# EAGLE board turbidimeter_fritzing (EAGLE 6.5.0)
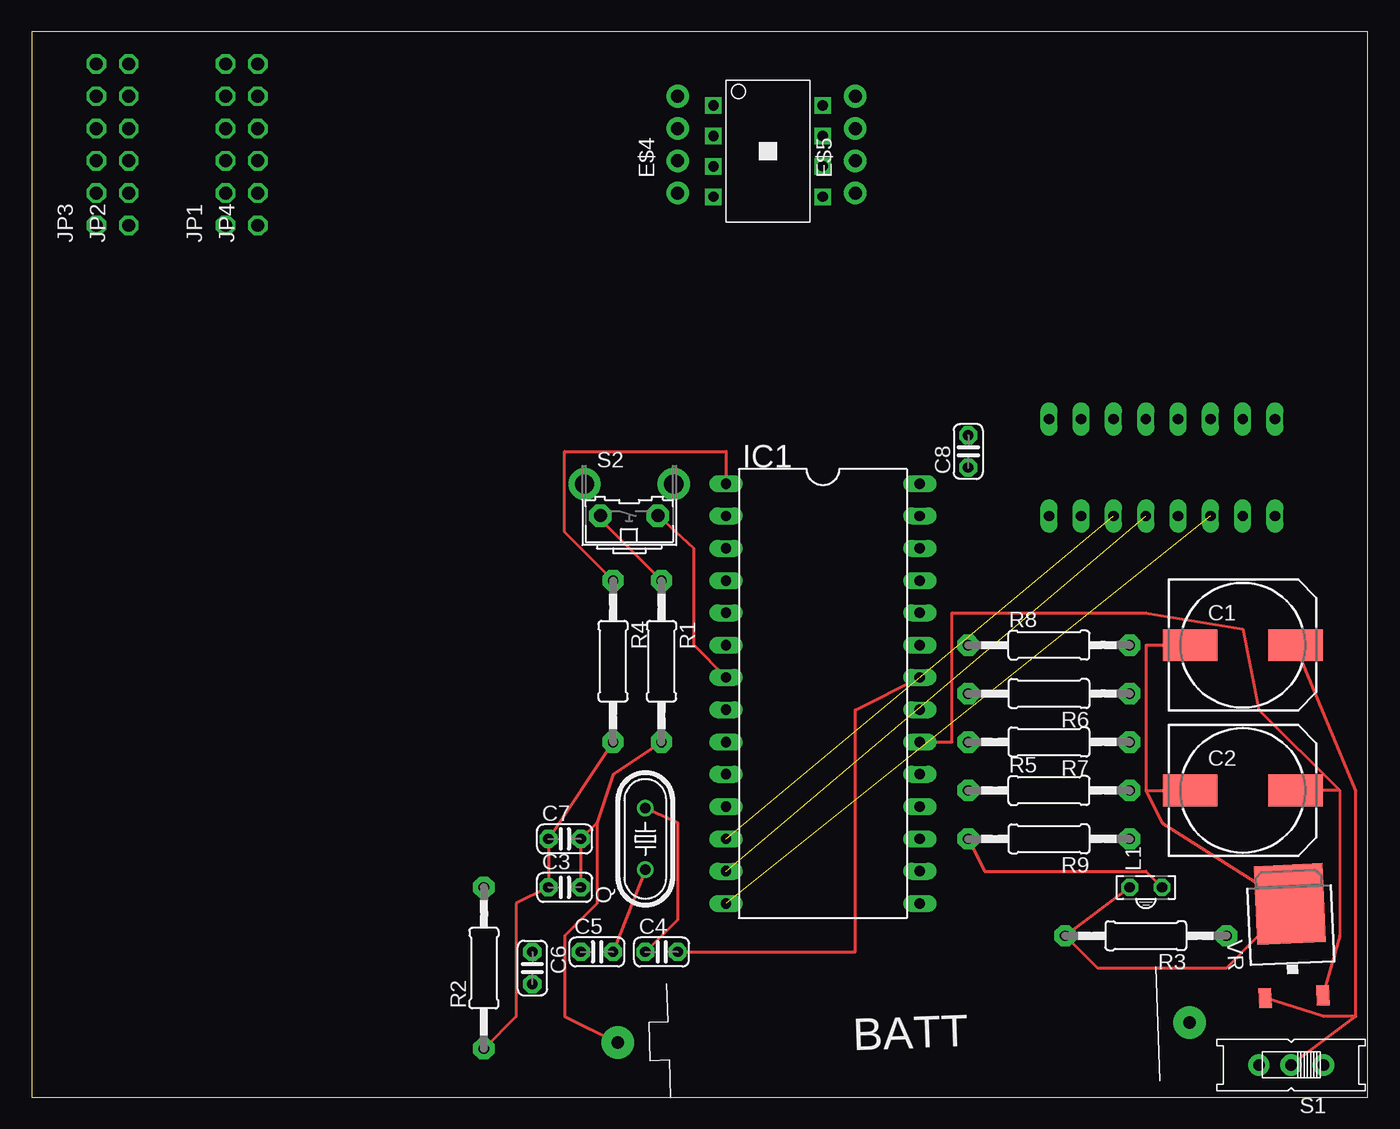
[diagram p0: board, top side]
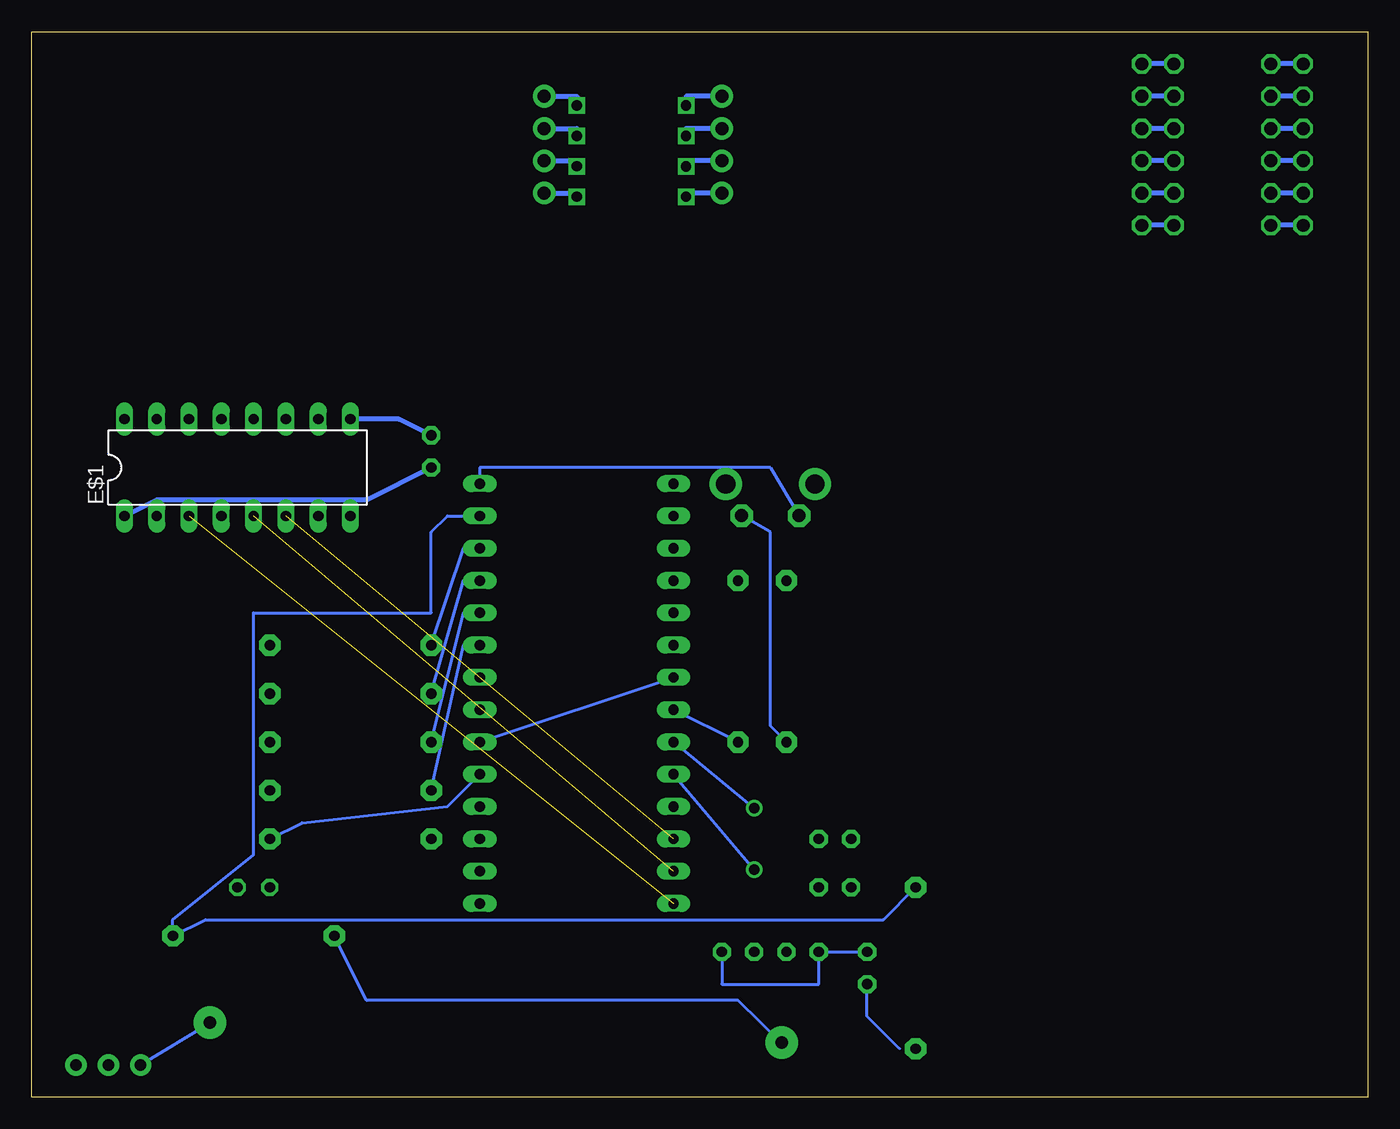
[diagram p1: board, bottom side, seen from below]

Size 105.08 x 83.81 mm. Coordinates in mm from the lower left corner, seen from the top.
Outline: 0,0 105.08,0 105.08,83.81 0,83.81 0,0
Copper layers (1*16): Top 0.035mm / dielectric 1.5mm / Bottom 0.035mm
Design rules "default": minimum track width 10mil, minimum drill 24mil, track to track 8mil, track to pad 8mil, pad to pad 8mil, via to via 8mil, smd to smd 8mil, copper to edge 40mil, drill to drill 8mil, minimum pad ring 10mil, minimum via ring 8mil, stop-mask expansion 4mil, vias tented up to drill 0mil, thermal gap 10mil

## Footprints (pad centres in the part's own frame; a part is rotated, then mirrored left to right if it is on the bottom)
12BH412 = drill 1 pad 2.54: + 22.5,0; - -22.5,0
140CLH-1010 = smd 4.3 x 2.5: + 4.15,0; - -4.15,0
C025-024X044 = drill 0.813 pad 1.422 octagon: 1 -1.27,0; 2 1.27,0
DIL16 = drill 0.813 long: 1 -8.89,-3.81; 2 -6.35,-3.81; 3 -3.81,-3.81; 4 -1.27,-3.81; 5 1.27,-3.81; 6 3.81,-3.81; 7 6.35,-3.81; 8 8.89,-3.81; 9 8.89,3.81; 10 6.35,3.81; 11 3.81,3.81; 12 1.27,3.81; 13 -1.27,3.81; 14 -3.81,3.81; 15 -6.35,3.81; 16 -8.89,3.81
1X04-CLEANBIG = drill 1.016 pad 1.778: 1 -3.81,0; 2 -1.27,0; 3 1.27,0; 4 3.81,0
DIL28-6 = drill 0.813 long: 1 -16.51,-7.62; 2 -13.97,-7.62; 3 -11.43,-7.62; 4 -8.89,-7.62; 5 -6.35,-7.62; 6 -3.81,-7.62; 7 -1.27,-7.62; 8 1.27,-7.62; 9 3.81,-7.62; 10 6.35,-7.62; 11 8.89,-7.62; 12 11.43,-7.62; 13 13.97,-7.62; 14 16.51,-7.62; 15 16.51,7.62; 16 13.97,7.62; 17 11.43,7.62; 18 8.89,7.62; 19 6.35,7.62; 20 3.81,7.62; 21 1.27,7.62; 22 -1.27,7.62; 23 -3.81,7.62; 24 -6.35,7.62; 25 -8.89,7.62; 26 -11.43,7.62; 27 -13.97,7.62; 28 -16.51,7.62
LIGHT_TO_FREQ_CONVERTER = drill 0.8 square: 1 2,-1; 2 4.39,-1; 3 6.79,-1; 4 9.18,-1; 5 9.18,7.6; 6 6.78,7.6; 7 4.39,7.6; 8 2,7.6
1X06-CLEAN = drill 1.016 octagon: 1 -6.35,0; 2 -3.81,0; 3 -1.27,0; 4 1.27,0; 5 3.81,0; 6 6.35,0
IRL80A = drill 0.813 octagon: A 0,-1.27; K 0,1.27
HC49/S = drill 0.813: 1 -2.413,0; 2 2.413,0
0207/12 = drill 0.813 pad 1.676 octagon: 1 -6.35,0; 2 6.35,0
EG1218 = drill 0.9 pad 1.676: O -2.54,0; P 0,0; S 2.54,0
B3F-31XX = drill 1.016 pad 1.778 octagon: 1 -2.261,-1.245; 2 2.261,-1.245 | drill 1.499 pad 2.54: 3 -3.505,1.245; 4 3.505,1.245
TO252 = smd 1 x 1.6: 1 -2.28,-4.8; 2 2.28,-4.8 | smd 5.4 x 6.2: 3 0,2.5

## Placement (x,y rotation side)
BATT  AAA  [12BH412]  68.58,5.08 182 top
C1  10uF  [140CLH-1010]  95.25,35.56 0 top
C2  10uF  [140CLH-1010]  95.25,24.13 0 top
C3  22pF  [C025-024X044]  41.91,16.51 0 top
C4  22pF  [C025-024X044]  49.53,11.43 0 top
C5  22pF  [C025-024X044]  44.45,11.43 0 top
C6  22pF  [C025-024X044]  39.37,10.16 270 top
C7  0.1nF  [C025-024X044]  41.91,20.32 0 top
C8  22pF  [C025-024X044]  73.66,50.8 90 top
E$1  [DIL16]  88.9,49.53 0 bottom
E$4  [1X04-CLEANBIG]  50.8,74.93 90 top
E$5  [1X04-CLEANBIG]  64.77,74.93 90 top
IC1  [DIL28-6]  62.23,31.75 270 top
IC3  LIGHT_TO_FREQ_CONVERTER  [LIGHT_TO_FREQ_CONVERTER]  54.61,80.01 270 top
JP1  [1X06-CLEAN]  15.24,74.93 90 top
JP2  [1X06-CLEAN]  7.62,74.93 90 top
JP3  [1X06-CLEAN]  5.08,74.93 90 top
JP4  [1X06-CLEAN]  17.78,74.93 90 top
L1  [IRL80A]  87.63,16.51 90 top
Q  [HC49/S]  48.26,20.32 90 top
R1  2.2k  [0207/12]  49.53,34.29 270 top
R2  10k  [0207/12]  35.56,10.16 90 top
R3  1k  [0207/12]  87.63,12.7 180 top
R4  22k  [0207/12]  45.72,34.29 270 top
R5  [0207/12]  80.01,24.13 0 top
R6  [0207/12]  80.01,31.75 180 top
R7  [0207/12]  80.01,27.94 180 top
R8  [0207/12]  80.01,35.56 0 top
R9  220  [0207/12]  80.01,20.32 180 top
S1  [EG1218]  99.06,2.54 180 top
S2  [B3F-31XX]  46.99,46.99 0 top
VR  7805DT  [TO252]  99.06,12.7 2.6 top

## Library data of the parts
BATT C1-C8 E$4 E$5 JP1-JP4 L1 R1-R9 S1 S2 = adafruit
E$1 = 74xx-us
IC1 = ic-package
IC3 = open_source_turbidimeter
Q = adafruit; OC_FARNELL: 1667008; OC_NEWARK: unknown
VR = linear

## Nets
GND: BATT.+ C1.- C2.- C3.2 C7.2 IC1.8 L1.K R1.2 R3.2 VR.3
N$1: IC1.23 R5.1
N$2: IC1.25 R6.2
N$3: IC1.26 R8.1
N$4: IC1.24 R7.2
N$5: IC1.28 R1.1 S2.1
N$6: IC1.19 R9.1
N$7: L1.A R9.2
N$8: BATT.- S1.S
N$10: C4.2 C5.1 C6.1 IC1.22
N$11: C1.+ S1.P VR.1
N$14: C4.1 IC1.9 Q.2
N$15: C2.+ C3.1 C7.1 IC1.7 IC1.20 R2.1 R4.2 S2.2 VR.2
N$16: IC1.1 R4.1
N$17: E$1.3 IC1.14
N$20: E$1.6 IC1.12
N$21: E$1.5 IC1.13
N$36: IC1.27 R2.2 R3.1
N$37: C5.2 IC1.10 Q.1
S$1: JP2.6 JP3.6
S$2: JP2.5 JP3.5
S$3: JP2.4 JP3.4
S$4: JP2.3 JP3.3
S$5: JP2.2 JP3.2
S$6: JP2.1 JP3.1
S$7: JP1.6 JP4.6
S$8: JP1.5 JP4.5
S$9: JP1.4 JP4.4
S$10: JP1.3 JP4.3
S$11: JP1.2 JP4.2
S$12: JP1.1 JP4.1
S$13: C8.2 E$1.9
S$14: C8.1 E$1.1
S$29: C6.2
S$30: E$4.4 IC3.1
S$31: E$4.3 IC3.2
S$32: E$4.2 IC3.3
S$33: E$4.1 IC3.4
S$34: E$5.4 IC3.8
S$35: E$5.3 IC3.7
S$36: E$5.2 IC3.6
S$37: E$5.1 IC3.5

## Tracks (layer width: path | path; a pad name or v marks a point on that pad's centre or on a via)
GND
  Top 0.254: 87.63,24.13 87.63,35.56 C1.- | 87.63,24.13 88.9,21.59 VR.3 93.98,10.16 83.82,10.16 R3.2 L1.K | 87.63,24.13 C2.- | C3.2 C7.2 44.45,21.59 | R1.2 45.72,25.4 44.45,21.59 | 44.45,21.59 44.45,15.24 41.91,12.7 41.91,6.35 BATT.+
  Bottom 0.254: R1.2 IC1.8 | R3.2 78.74,7.62 49.53,7.62 BATT.+
N$1
  Bottom 0.254: R5.1 71.12,35.56 IC1.23
N$2
  Bottom 0.254: R6.2 71.12,40.64 IC1.25
N$3
  Bottom 0.254: R8.1 71.12,43.18 IC1.26
N$4
  Bottom 0.254: R7.2 71.12,38.1 IC1.24
N$5
  Top 0.254: R1.1 44.45,45.72 S2.1
  Bottom 0.254: IC1.28 69.85,49.53 46.99,49.53 S2.1
N$6
  Bottom 0.254: R9.1 83.82,21.59 72.39,22.86 IC1.19
N$7
  Top 0.254: R9.2 74.93,17.78 87.63,17.78 L1.A
N$8
  Bottom 0.254: S1.S BATT.-
N$10
  Top 0.254: IC1.22 64.77,30.48 64.77,11.43 C4.2
  Bottom 0.254: C6.1 C5.1 43.18,8.89 50.8,8.89 C4.2
N$11
  Top 0.254: 104.14,6.35 101.6,6.35 VR.1 | S1.P 104.14,6.35 | C1.+ 104.14,24.13 104.14,6.35
N$14
  Top 0.254: C4.1 50.8,13.97 50.8,21.59 Q.2
  Bottom 0.254: IC1.9 Q.2
N$15
  Top 0.254: R4.2 C7.1 C3.1 38.1,15.24 38.1,6.35 R2.1 | 102.87,24.13 102.87,12.7 VR.2 | IC1.7 52.07,35.56 52.07,43.18 S2.2 | IC1.20 72.39,27.94 72.39,38.1 87.63,38.1 95.25,36.83 96.52,30.48 102.87,24.13 | 102.87,24.13 C2.+
  Bottom 0.254: IC1.20 IC1.7 | R4.2 46.99,29.21 46.99,44.45 S2.2
N$16
  Top 0.254: IC1.1 54.61,50.8 41.91,50.8 41.91,44.45 R4.1
N$17  (1 unrouted)
N$20  (1 unrouted)
N$21  (1 unrouted)
N$36
  Bottom 0.254: IC1.27 72.39,45.72 73.66,44.45 73.66,38.1 87.63,38.1 87.63,19.05 93.98,13.97 R3.1 91.44,13.97 38.1,13.97 R2.2
N$37
  Top 0.254: Q.1 C5.2
  Bottom 0.254: IC1.10 Q.1
S$1
  Bottom 0.406: JP3.6 JP2.6
S$2
  Bottom 0.406: JP3.5 JP2.5
S$3
  Bottom 0.406: JP3.4 JP2.4
S$4
  Bottom 0.406: JP3.3 JP2.3
S$5
  Bottom 0.406: JP3.2 JP2.2
S$6
  Bottom 0.406: JP3.1 JP2.1
S$7
  Bottom 0.406: JP1.6 JP4.6
S$8
  Bottom 0.406: JP1.5 JP4.5
S$9
  Bottom 0.406: JP1.4 JP4.4
S$10
  Bottom 0.406: JP1.3 JP4.3
S$11
  Bottom 0.406: JP1.2 JP4.2
S$12
  Bottom 0.406: JP1.1 JP4.1
S$13
  Bottom 0.406: C8.2 76.2,53.34 E$1.9
S$14
  Bottom 0.406: C8.1 78.74,46.99 95.25,46.99 E$1.1
S$29
  Bottom 0.254: C6.2 39.37,6.35 36.83,3.81
S$30
  Bottom 0.406: E$4.4 53.61,78.74 IC3.1
S$31
  Bottom 0.406: E$4.3 53.61,76.2 IC3.2
S$32
  Bottom 0.406: E$4.2 53.61,73.66 IC3.3
S$33
  Bottom 0.406: E$4.1 53.61,71.12 IC3.4
S$34
  Bottom 0.406: E$5.4 62.21,78.74 IC3.8
S$35
  Bottom 0.406: E$5.3 62.21,76.2 IC3.7
S$36
  Bottom 0.406: E$5.2 62.21,73.66 IC3.6
S$37
  Bottom 0.406: E$5.1 62.21,71.12 IC3.5